# Altium PCB PCB.PcbDoc
Units mil, origin at the board's own origin, x right, y up, seen from the top; angles counter-clockwise.
Board outline 6000 x 4000 mil, 2 copper layers (Top Layer, Bottom Layer); 23 components, 21 nets, 98 pads, 0 vias.
Unrouted connection lines stored in the file: 47.
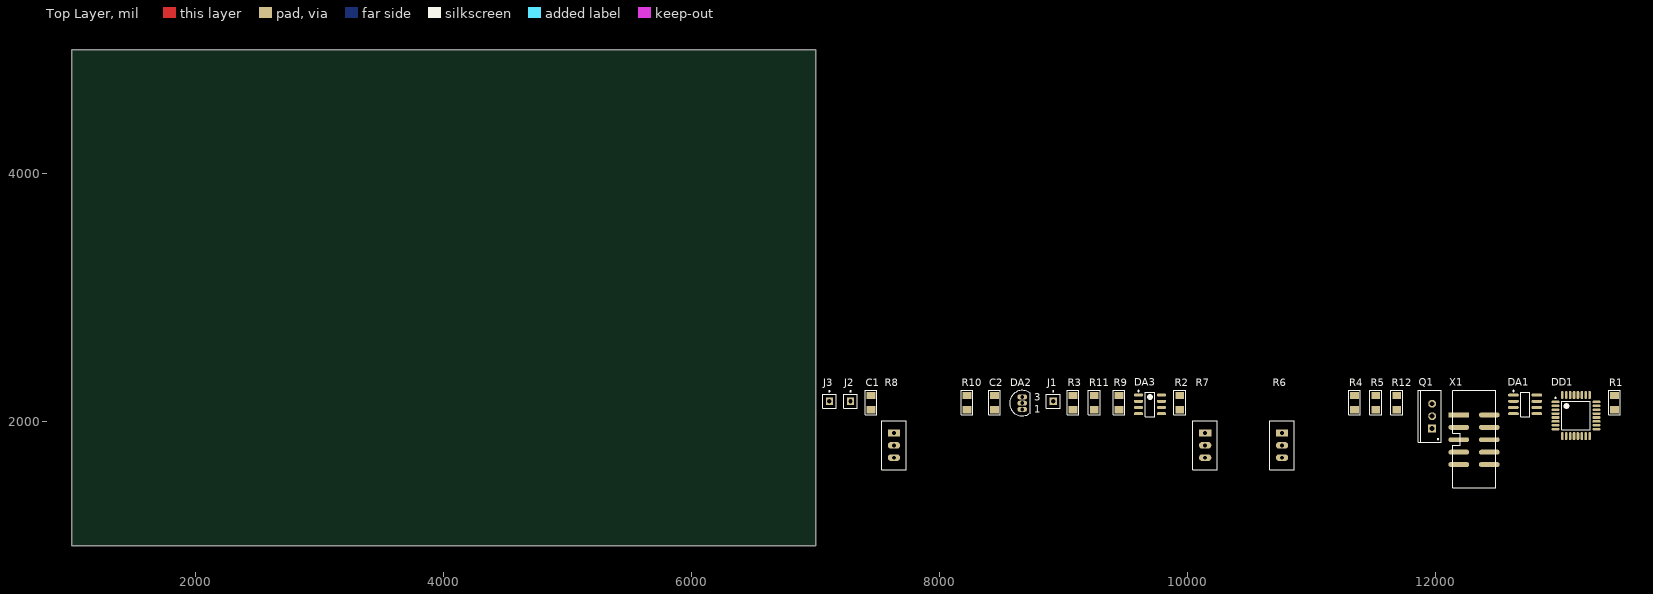
[diagram p0: Top Layer view]
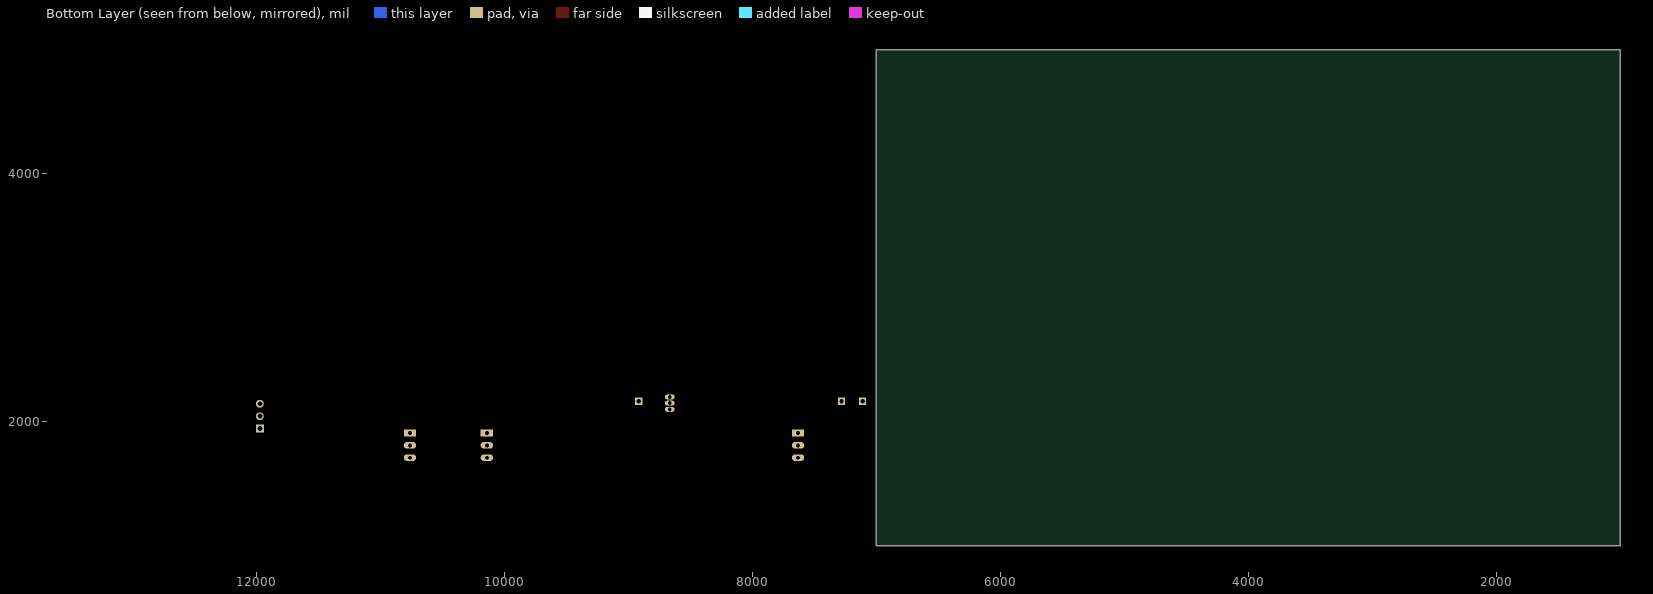
[diagram p1: Bottom Layer view, seen from below]

## Layer stack, top to bottom
Top Solder: solder mask 0.4, Solder Resist, Dk 3.5
Top Layer: signal copper 1.4
Dielectric 1: dielectric 12.6, FR-4, Dk 4.8
Bottom Layer: signal copper 1.4
Bottom Solder: solder mask 0.4, Solder Resist, Dk 3.5

## Board outline
1000,1000 7000,1000 7000,5000 1000,5000

## Design rules (kind name [scope] priority, off if disabled: settings)
Clearance [All] p1: gap=10
PasteMaskExpansion [All] p1 off: expansion=0
PolygonConnect [All] p1: connectstyle=Relief reliefconductorwidth=10 reliefentries=4 polygonreliefangle="90 Angle" airgapwidth=10
RoomDefinition cpu [InComponentClass('cpu')] p1: confinementstyle=ConfineIn formatcopy=TRUE lockcomponents=FALSE outline 7045,1055 13500,1055 13500,2365 7045,2365
RoutingVias [All] p1: holewidth=28 width=50 viastyle="Through Hole" minholewidth=28 minwidth=50 maxholewidth=28 maxwidth=50
SolderMaskExpansion [All] p1 off: expansion=4
Width [All] p1: maxlimit=10 minlimit=10 preferedwidth=10
28 further rules are at their usual default settings.

## Components (designator, comment, footprint, x,y, rotation, side; value= is the part's Value field where it differs from the comment)
C1 "100nF" R1206 7445,2155 r90 top
C2 "47nF" R1206 8440,2155 r90 top
DA1 "REF192GS" SO-8_N 12720,2140 r0 top
DA2 "µA78L05CLP" LP03 8665,2150 r0 top
DA3 "LM258D" D008_L 9695,2140 r0 top
DD1 "ATmega168A-AU" 32A_N 13130,2050 r0 top
J1 "Socket" PIN1 8915,2165 r0 top
J2 "Socket" PIN1 7280,2165 r0 top
J3 "Socket" PIN1 7110,2165 r0 top
Q1 "IRFZ46N" TO-220AB 11970,2045 r90 top
R1 "1K" R1206 13440,2155 r90 top
R2 "390" R1206 9935,2155 r90 top
R3 "10K" R1206 9075,2155 r90 top
R4 "3.3K" R1206 11345,2155 r90 top
R5 "3.3K" R1206 11515,2155 r90 top
R6 "10K" 3296x 10760,1910 r0 top
R7 "100K" 3296x 10140,1910 r0 top
R8 "100" 3296x 7630,1910 r0 top
R9 "2K" R1206 9445,2155 r90 top
R10 "1.5K" R1206 8220,2155 r90 top
R11 "510K" R1206 9245,2155 r90 top
R12 "100K" R1206 11685,2155 r90 top
X1 "BHS-10" BHS-10 12185,2055 r0 top

## Footprints (in the part's own frame and the unit in brackets; to place one, negate y for a bottom-side part, rotate by r counter-clockwise, add the part's x,y. Pads: shape width x height; smd on the part's side, far side on the other; paste and mask are expansions set on the pad)
32A_N [mm] "Thin QFP, 32-Leads, Body 7x7mm, Pitch 0.8mm, IPC Medium Density"
  oval 1.65x0.55 smd: 1(-4.2,2.8) 2(-4.2,2) 3(-4.2,1.2) 4(-4.2,0.4) 5(-4.2,-0.4) 6(-4.2,-1.2) 7(-4.2,-2) 8(-4.2,-2.8) 17(4.2,-2.8) 18(4.2,-2) 19(4.2,-1.2) 20(4.2,-0.4) 21(4.2,0.4) 22(4.2,1.2) 23(4.2,2) 24(4.2,2.8)
  oval 0.55x1.65 smd: 9(-2.8,-4.2) 10(-2,-4.2) 11(-1.2,-4.2) 12(-0.4,-4.2) 13(0.4,-4.2) 14(1.2,-4.2) 15(2,-4.2) 16(2.8,-4.2) 25(2.8,4.2) 26(2,4.2) 27(1.2,4.2) 28(0.4,4.2) 29(-0.4,4.2) 30(-1.2,4.2) 31(-2,4.2) 32(-2.8,4.2)
  silkscreen extent -4.32,-2.95 2.95,3.75, body extent -3.5,-3.5 3.5,3.5, height 1.2
3296x [mm]
  rect 2.5x1.4 hole 0.8: 1(0,0)
  oval 2.5x1.4 hole 0.8: 2(0,-2.54) 3(0,-5.08)
  silkscreen extent -2.5,-7.5 2.5,2.5, body extent -2.5,-7.5 2.5,2.5, height 12
BHS-10 [mm]
  rect 4.25x1 smd: 1(0,0)
  oval 4.25x1 smd: 2(6.25,0) 3(0,-2.54) 4(6.25,-2.54) 5(0,-5.08) 6(6.25,-5.08) 7(0,-7.62) 8(6.25,-7.62) 9(0,-10.16) 10(6.25,-10.16)
  silkscreen extent -1.2,-14.95 7.55,5.05, body extent -1.2,-14.95 7.55,5.05, height 8.6
D008_L [mm] "SOIC, 8-Leads, Body 4.9x3.9mm, Pitch 1.27mm, IPC High Density"
  oval 1.9x0.6 smd: 1(-2.35,1.905) 2(-2.35,0.635) 3(-2.35,-0.635) 4(-2.35,-1.905) 5(2.35,-1.905) 6(2.35,-0.635) 7(2.35,0.635) 8(2.35,1.905)
  silkscreen extent -2.47,-2.5 1,2.88, body extent -2,-2.5 2,2.5, height 1.75
LP03 [mm] "TO, Flat Index; 3 In-Line, Axial Leads; Body Dia. 4.8mm; Leads 0.56 x 0.41 mm (max)"
  oval 2x1 hole 0.8: 1(0,-1.27) 2(0,0) 3(0,1.27)
  silkscreen extent -2.6,-2.6 1.6,2.6
PIN1 [mm] "Connector; Plug"
  rect 1.5x1.5 hole 0.9: 1(0,0)
  silkscreen extent -1.4,-1.4 1.4,2.17
R1206 [mm]
  rect 1.5x1.8 smd: 1(-1.45,0) 2(1.45,0)
  silkscreen extent -2.5,-1.2 2.5,1.2, body extent -1.6,-0.85 1.6,0.85, height 0.6
SO-8_N [mm] "SOIC, 8-Leads, Body 4.9x3.9mm, Pitch 1.27mm, IPC Medium Density"
  oval 2.2x0.6 smd: 1(-2.4,1.905) 2(-2.4,0.635) 3(-2.4,-0.635) 4(-2.4,-1.905) 5(2.4,-1.905) 6(2.4,-0.635) 7(2.4,0.635) 8(2.4,1.905)
  silkscreen extent -2.52,-2.5 0.9,2.88, body extent -2,-2.5 2,2.5, height 1.75
TO-220AB [mm] "TO, Thru-Hole, Vertical, Heatsink Mounted; 3 In-Line Leads; Pitch 2.54 mm"
  rect 1.6x1.6 hole 1: 1(-2.54,0)
  round 1.6 hole 1: 2(0,0) 3(2.54,0)
  silkscreen extent -5.35,-1.85 5.35,2.85, body extent -5.4,-1.9 5.4,2.9, height 19.3

## Part data
C1 C2: library part cap
DA1: "2.50V, Precision Micropower, Low-Dropout, Voltage Reference"
DA2: "Positive-Voltage Regulator"
DA3: "Dual Operational Amplifier"
DD1: "8-bit AVR Microcontroller, 16KB Flash, 512 Bytes EEPROM, 1KB SRAM, 32-pin TQFP, Industrial Grade (-40°C to 85°C)"
Q1: "HEXFET Power MOSFET"
R1 R2 R3 R4 R5 R9 R10 R11 R12: library part Res
R6 R7 R8: library part RES_P

## Nets (pads, with @x,y where several pads share a name; then routed paths per layer and width w, separated by ;. In a path a pad name is that pad's centre, name@x,y a point inside that pad or via, vN(x,y) a via of type N, cw(c..) or ccw(c..) an arc to the next point about the centre after c; other vN are vias at no path point)
5V: DA2.1 DA3.8 DD1.4 DD1.6 R4.2 R5.2 R6.2 R6.3
12V: J3.1
/OE: DD1.12
GND: C1.1 C2.1 DA1.3 DA1.4 DA2.2 DA3.4 DA3.5 DA3.6 DD1.3 DD1.5 DD1.19 DD1.21 J2.1 R1.2 R8.1 R10.1 X1.2 X1.10
LE: DD1.14
MISO: DD1.16 X1.3
MOSI: DD1.15 X1.9
NetDA2_3: DA2.3 J1.1
NetDA3_1: DA3.1 R11.2 R12.1
NetDA3_2: DA3.2 R2.2 R7.1 R7.2
NetDA3_3: DA3.3 R3.2
NetR2_1: R2.1 R5.1 R8.2 R8.3 R10.2
NetR6_1: R6.1 R9.2
NetR7_3: R7.3 R12.2
PWM: DD1.13
RESET: DD1.29 R1.1 X1.5
SCK: DD1.17 X1.1
TADC: C2.2 DD1.22 R11.1
TIN: C1.2 R3.1 R4.1 R9.1
TXD: DD1.31
VDD: X1.4
pads on no net: DA1.1 DA1.2 DA1.5 DA1.6 DA1.7 DA1.8 DA3.7 DD1.1 DD1.2 DD1.7 DD1.8 DD1.9 DD1.10 DD1.11 DD1.18 DD1.20 DD1.23 DD1.24 DD1.25 DD1.26 DD1.27 DD1.28 DD1.30 DD1.32 Q1.1 Q1.2 Q1.3 X1.6 X1.7 X1.8

## Text inside footprints (layer, text, board x,y; h text height)
DA2: Top Overlay "1" at 8760.32,2072.09 h59.05; Top Overlay "3" at 8760.32,2168.39 h59.05